# Altium PCB spine.PcbDoc
Units mm, origin at the board's own origin, x right, y up, seen from the top; angles counter-clockwise.
Board outline 56 x 85.01 mm, 2 copper layers (Top, Bottom); 70 components, 74 nets, 404 pads, 89 vias.
Unrouted connection lines stored in the file: 1.
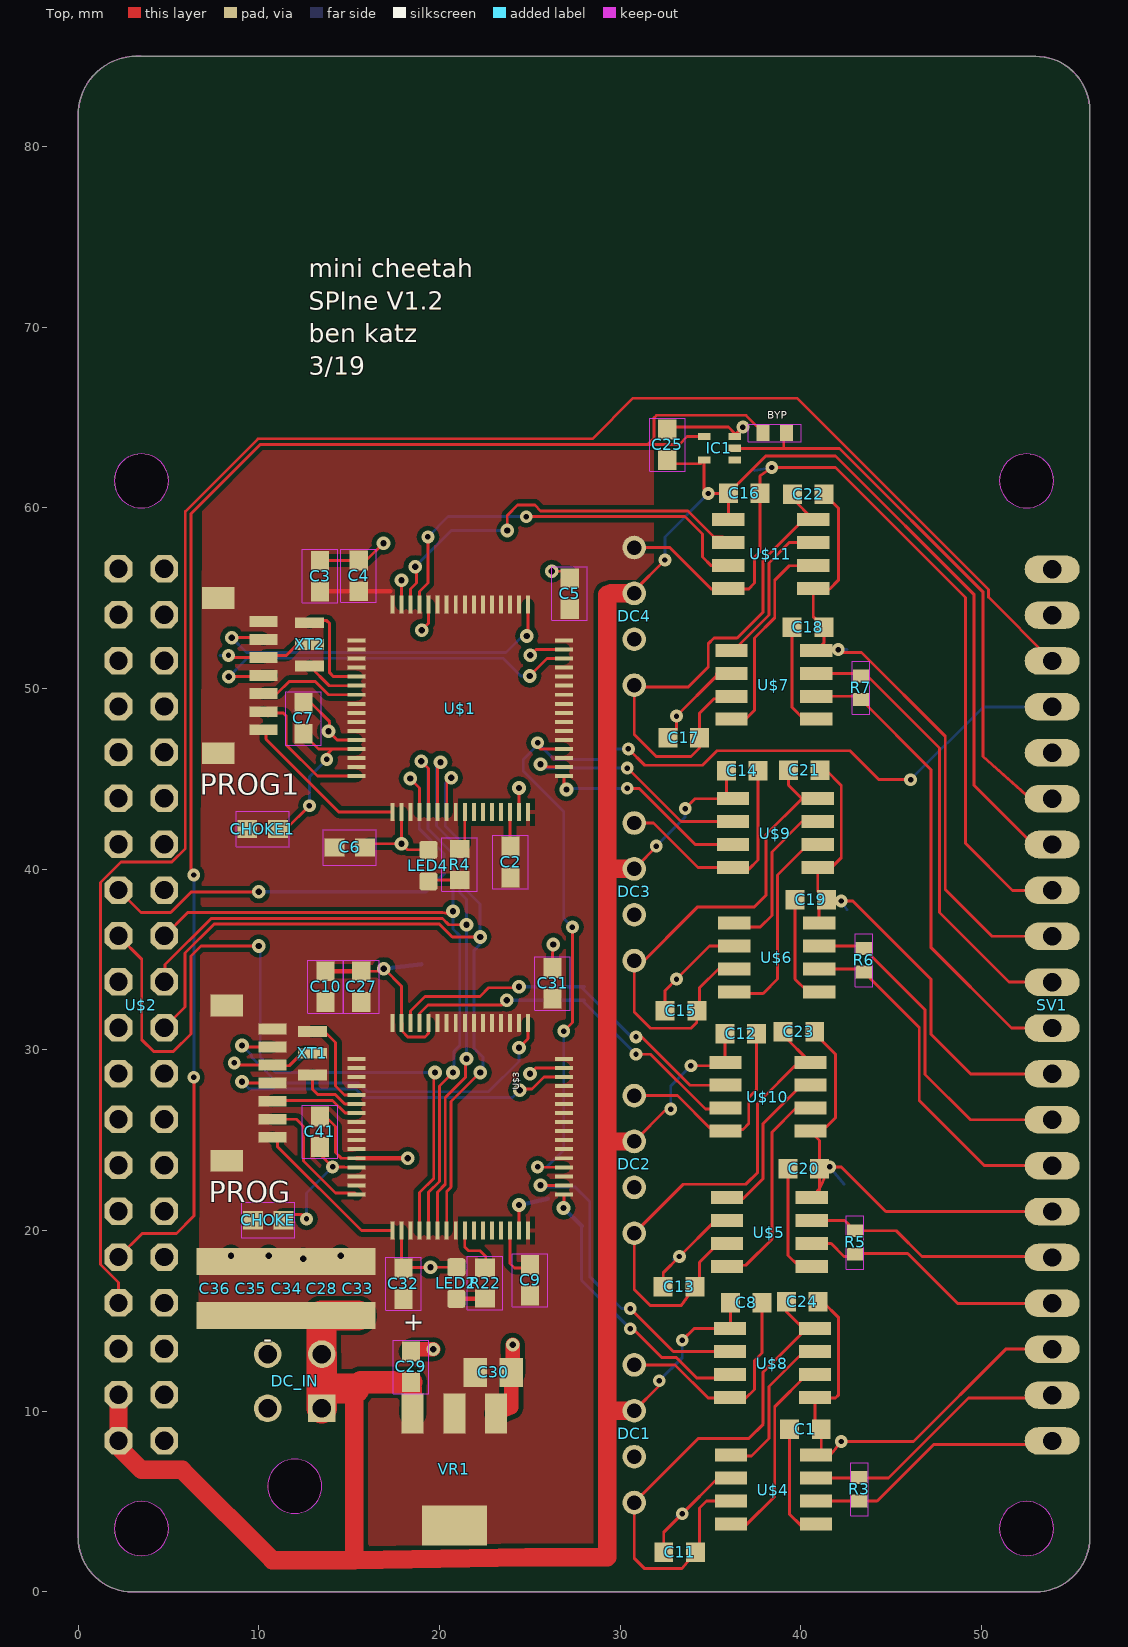
[diagram p0: Top view]
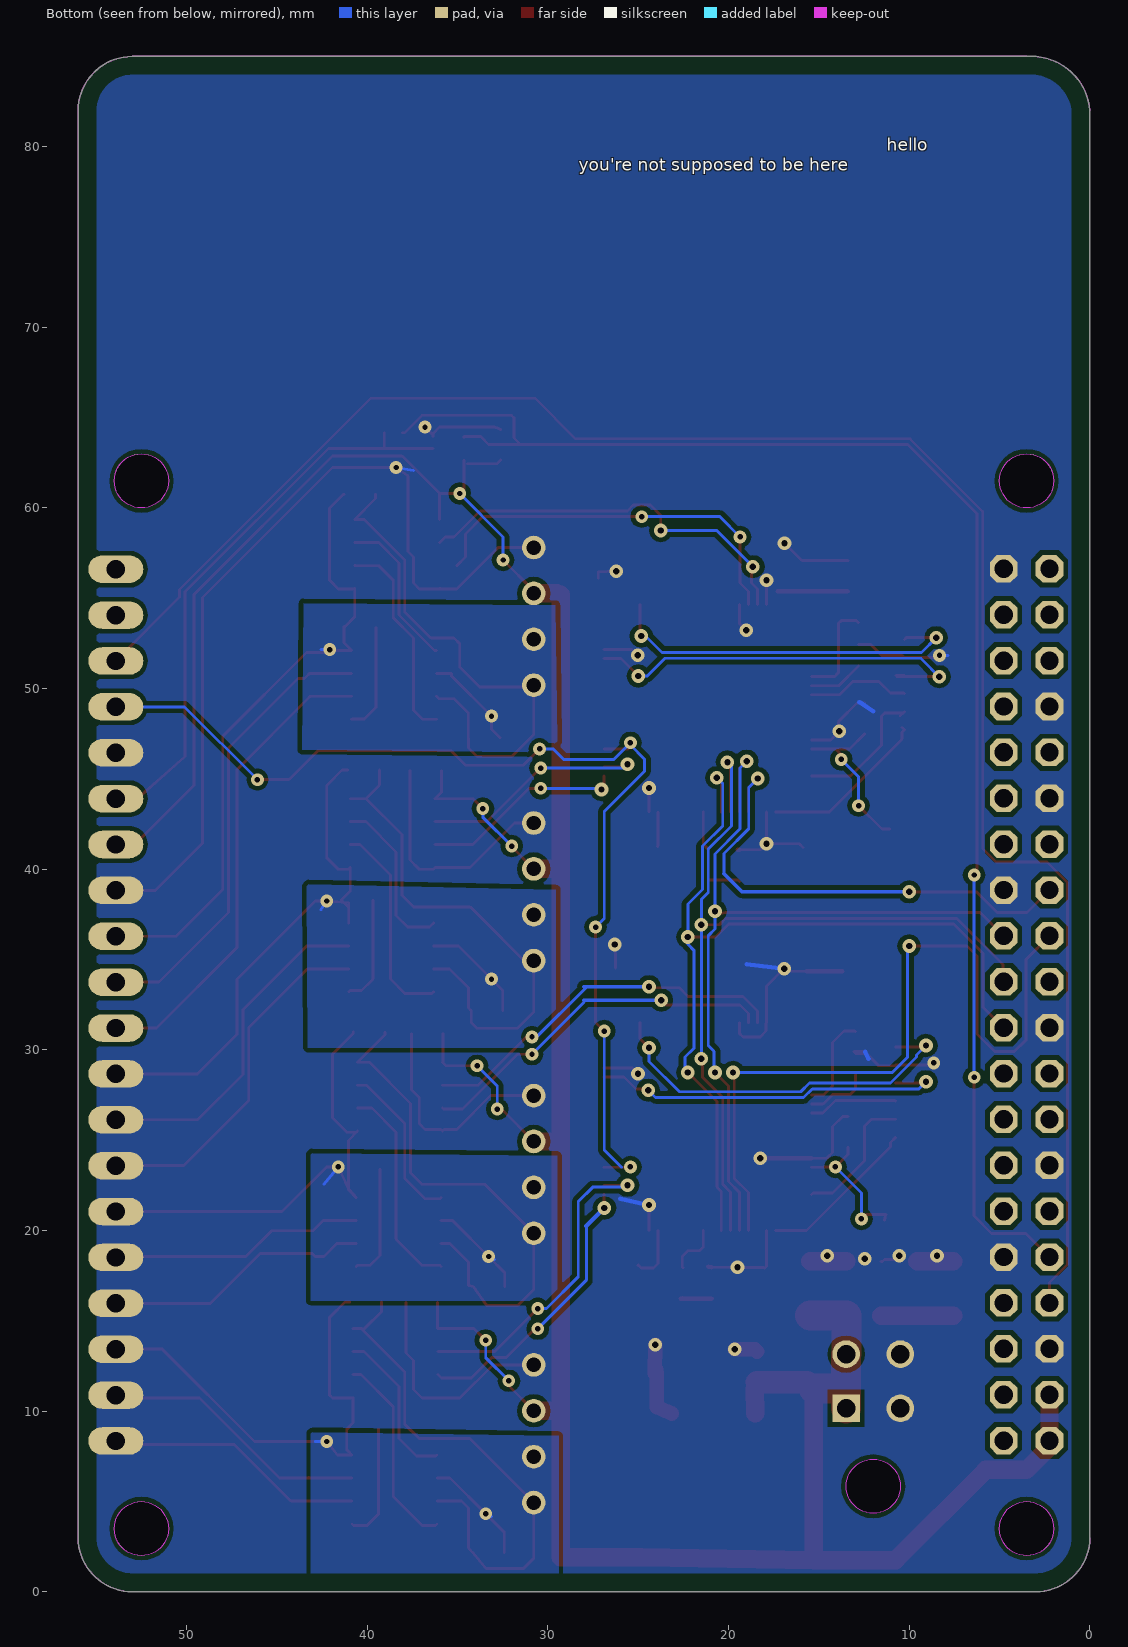
[diagram p1: Bottom view, seen from below]

## Layer stack, top to bottom
Top Solder: solder mask 0.0102, Solder Resist, Dk 3.5
Top: signal copper 0.035
Dielectric 1: dielectric 0.32, FR-4, Dk 4.8
Bottom: signal copper 0.035
Bottom Solder: solder mask 0.0102, Solder Resist, Dk 3.5

## Board outline
56,82 56,3 cw(c53,3) 53,0 3,0 cw(c3,3) 0,3 0,82 cw(c3.25,81.75) 3.5,85 53,85 cw(c53,82)
cut-out: 52.5,60 ccw(c52.5,61.5) 54,61.5 ccw(c52.5,61.5) 52.5,63 ccw(c52.5,61.5) 51,61.5 ccw(c52.5,61.5)
cut-out: 52.5,2 ccw(c52.5,3.5) 54,3.5 ccw(c52.5,3.5) 52.5,5 ccw(c52.5,3.5) 51,3.5 ccw(c52.5,3.5)
cut-out: 3.5,60 ccw(c3.5,61.5) 5,61.5 ccw(c3.5,61.5) 3.5,63 ccw(c3.5,61.5) 2,61.5 ccw(c3.5,61.5)
cut-out: 11.99,4.34 ccw(c11.99,5.84) 13.49,5.84 ccw(c11.99,5.84) 11.99,7.34 ccw(c11.99,5.84) 10.49,5.84 ccw(c11.99,5.84)
cut-out: 3.5,2 ccw(c3.5,3.5) 5,3.5 ccw(c3.5,3.5) 3.5,5 ccw(c3.5,3.5) 2,3.5 ccw(c3.5,3.5)

## Design rules (kind name [scope] priority, off if disabled: settings)
BoardOutlineClearance mdCopperDimension [All] p1: gap=0.254 ignorepadtopadclearanceinfootprint=FALSE except(0: Arc-SplitContinuation Track-SplitContinuation SMDPad-SplitContinuation THPad-SplitContinuation Via-SplitContinuation Fill-SplitContinuation Poly-SplitContinuation Region-SplitContinuation Text-SplitContinuation; 1.016: Poly-OutlineEdge Poly-CavityEdge Poly-CutoutEdge Poly-SplitBarrior)
Clearance Clearance_for_PolygonClass_Isolate_9.84 [InPolygonClass('Isolate_9.84') vs IsArc Or IsTrack Or IsPad Or IsVia Or IsFill Or IsRegion Or IsText] p1: gap=0.25 ignorepadtopadclearanceinfootprint=FALSE
Clearance Clearance_for_PolygonClass_Isolate_10 [InPolygonClass('Isolate_10') vs IsArc Or IsTrack Or IsPad Or IsVia Or IsFill Or IsRegion Or IsText] p2: gap=0.254 ignorepadtopadclearanceinfootprint=FALSE
Clearance "Clearance (Same Net)" [All] p3: gap=0.152 ignorepadtopadclearanceinfootprint=FALSE
Clearance [All] p4: gap=0.152 ignorepadtopadclearanceinfootprint=FALSE
HoleSize [All] p1: absolutevalues=TRUE maxlimit=2540 minlimit=0.3 maxpercent=80.000 minpercent=20.000
HoleToHoleClearance mdDrill [All] p1: gap=0.152 allowstackedmicrovias=TRUE
MinimumSolderMaskSliver [All] p1 off: minsoldermaskwidth=0.254
PasteMaskExpansion mlMinCreamFrame [All] p1: expansion=0
PolygonConnect PolygonConnect_For_PolygonThermal_ON_Width98400_Gap100000 [InPolygonClass('PolygonThermal_ON_Width98400_Gap100000') vs Not IsVia] p1: connectstyle=Relief reliefconductorwidth=0.25 reliefentries=4 polygonreliefangle="90 Angle" airgapwidth=0.254
PolygonConnect PolygonConnect_For_PolygonThermal_ON_Width100000_Gap100000 [InPolygonClass('PolygonThermal_ON_Width100000_Gap100000') vs Not IsVia] p2: connectstyle=Relief reliefconductorwidth=0.254 reliefentries=4 polygonreliefangle="90 Angle" airgapwidth=0.254
PolygonConnect PolygonConnect_For_PolygonThermal_ON_Width160000_Gap100000 [InPolygonClass('PolygonThermal_ON_Width160000_Gap100000') vs Not IsVia] p3: connectstyle=Relief reliefconductorwidth=0.406 reliefentries=4 polygonreliefangle="90 Angle" airgapwidth=0.254
PolygonConnect ThermalVias [IsVia] p4: connectstyle=Direct reliefconductorwidth=0.254 reliefentries=4 polygonreliefangle="90 Angle" airgapwidth=0.254
PolygonConnect [All] p5: connectstyle=Relief reliefconductorwidth=0.254 reliefentries=4 polygonreliefangle="90 Angle" airgapwidth=0.254
RoutingVias [All] p1: holewidth=0.3 width=0.706 viastyle="Through Hole" minholewidth=0.3 minwidth=0.706 maxholewidth=2.54 maxwidth=2.54
SolderMaskExpansion mlMinStopFrame [All] p1: expansion=0.102 istentingtop=FALSE
Width [All] p1: maxlimit=0.254 minlimit=0.152 preferedwidth=0.152
26 further rules are at their usual default settings.

## Classes and differential pairs
polygon class PolygonThermal_ON_Width98400_Gap100000: Polygon_1_Net_3V3
polygon class PolygonThermal_ON_Width100000_Gap100000: Polygon_1_Net_CAN1_GND Polygon_1_Net_CAN2_GND Polygon_1_Net_CAN3_GND
polygon class PolygonThermal_ON_Width160000_Gap100000: Polygon_1_Net_CAN4_GND Polygon_1_Net_GND
polygon class Isolate_9.84: Polygon_1_Net_3V3
polygon class Isolate_10: Polygon_1_Net_CAN1_GND Polygon_1_Net_CAN2_GND Polygon_1_Net_CAN3_GND Polygon_1_Net_CAN4_GND Polygon_1_Net_GND

## Components (designator, comment, footprint, x,y, rotation, side; value= is the part's Value field where it differs from the comment)
BYP "" R0402 38.56,64.16 r180 top
C1 ".1 uF" C0603K 40.26,9 r0 top
C2 "4.7" C0603 23.94,40.4 r90 top
C3 "1uF" C0603 13.39,56.23 r90 top
C4 "100nF" C0603 15.53,56.24 r90 top
C5 "100nF" C0603 27.21,55.26 r90 top
C6 "100nF" C0603 15.03,41.21 r0 top
C7 "1 uF" C0603 12.46,48.35 r90 top
C8 ".1 uF" C0603K 36.98,16.01 r0 top
C9 "4.7" C0603 25.02,17.25 r90 top
C10 "1uF" C0603 13.69,33.5 r90 top
C11 "1 uF" C0603K 33.29,2.18 r180 top
C12 ".1 uF" C0603K 36.68,30.89 r0 top
C13 "1 uF" C0603K 33.26,16.9 r180 top
C14 ".1 uF" C0603K 36.76,45.45 r0 top
C15 "1 uF" C0603K 33.37,32.17 r180 top
C16 ".1 uF" C0603K 36.87,60.81 r0 top
C17 "1 uF" C0603K 33.53,47.28 r180 top
C18 ".1 uF" C0603K 40.4,53.39 r0 top
C19 ".1 uF" C0603K 40.56,38.3 r0 top
C20 ".1 uF" C0603K 40.17,23.41 r0 top
C21 ".1 uF" C0603K 40.19,45.49 r0 top
C22 ".1 uF" C0603K 40.41,60.76 r0 top
C23 ".1 uF" C0603K 39.9,31 r0 top
C24 ".1 uF" C0603K 40.09,16.05 r0 top
C25 "100nF" C0603 32.61,63.5 r90 top
C27 "100nF" C0603 15.67,33.5 r90 top
C28 "47 uF" C1206K 13.47,16.79 r90 top
C29 "100nF" C0603 18.42,12.45 r90 top
C30 "10uF" C0805K 22.97,12.15 r0 top
C31 "100nF" C0603 26.26,33.68 r90 top
C32 "100nF" C0603 18,17.06 r90 top
C33 "47 uF" C1206K 15.47,16.79 r90 top
C34 "47 uF" C1206K 11.55,16.79 r90 top
C35 "47 uF" C1206K 9.55,16.79 r90 top
C36 "47 uF" C1206K 7.55,16.79 r90 top
C41 "1 uF" C0603 13.38,25.47 r90 top
CHOKE "600r" 0603 10.52,20.57 r0 top
CHOKE1 "600r" 0603 10.21,42.22 r0 top
DC1 "VA-1224S" 4SIL 30.78,8.75 r270 top
DC2 "VA-1224S" 4SIL 30.78,23.66 r270 top
DC3 "VA-1224S" 4SIL 30.78,38.75 r270 top
DC4 "VA-1224S" 4SIL 30.78,54 r270 top
DC_IN "" 43045-0400 11.99,5.84 r0 top
IC1 "74AHC1G14DCK" SC70-5 35.5,63.3 r90 top
LED2 "G" LED-0603 20.93,17.09 r0 top
LED4 "G" LED-0603 19.39,40.2 r0 top
PROG "BM07B-SRSS-TB" BM07B-SRSS-TB 9.12,28.16 r90 top
PROG1 "BM07B-SRSS-TB" BM07B-SRSS-TB 8.64,50.72 r90 top
R3 "" R0402 43.24,5.68 r90 top
R4 "70" R0603 21.12,40.26 r90 top
R5 "" R0402 43.01,19.34 r90 top
R6 "" R0402 43.49,34.96 r90 top
R7 "" R0402 43.33,50.05 r90 top
R22 "70" R0603 22.52,17.09 r90 top
SV1 "" MA20-1L 53.92,32.48 r90 top
U$1 "STM32F446RET6" TQFP64 21.15,48.91 r270 top
U$2 "" UP_BOARD 56,0 r90 top
U$3 "STM32F446RET6" TQFP64 21.15,25.75 r270 top
U$4 "MCP2561" SO08 38.49,5.66 r270 top
U$5 "MCP2561" SO08 38.26,19.91 r270 top
U$6 "MCP2561" SO08 38.67,35.12 r270 top
U$7 "MCP2561" SO08 38.51,50.21 r270 top
U$8 "SI8410" SO08 38.43,12.66 r270 top
U$9 "SI8410" SO08 38.59,42 r270 top
U$10 "SI8410" SO08 38.18,27.41 r270 top
U$11 "SI8410" SO08 38.34,57.46 r270 top
VR1 "LM1117" SOT-223 20.83,6.77 r180 top
XT1 "CSTCE" CSTCE 12.97,29.81 r270 top
XT2 "CSTCE" CSTCE 12.81,52.45 r270 top

## Footprints (in the part's own frame and the unit in brackets; to place one, negate y for a bottom-side part, rotate by r counter-clockwise, add the part's x,y. Pads: shape width x height; smd on the part's side, far side on the other; paste and mask are expansions set on the pad)
4SIL [mil] "4SIL"
  round 51.5 hole 31.5: 1(-150,0) 2(-50,0) 3(50,0) 4(150,0)
  body extent -176,-26 176,26, height 50
0603 [mm] "0603"
  rect 1.1x1 smd: 1(-0.85,0) 2(0.85,0)
  Top keep-out lines w0.051: -1.473,-0.983 -1.473,0.983 1.473,0.983 1.473,-0.983 -1.473,-0.983
  body extent -1.5,-1.01 1.5,1.01, height 3.81
43045-0400 [mm] "43045-0400"
  rect 1.53x1.53 / inner round 1.414 / far side rect 1.53x1.53 hole 1.02: P$1(1.5,4.32)
  round 1.53 hole 1.02: P$2(-1.5,4.32) P$3(1.5,7.32) P$4(-1.5,7.32)
  body extent -2.27,3.55 2.27,8.09, height 1.27
BM07B-SRSS-TB [mm] "BM07B-SRSS-TB"
  rect 0.6x1.55 smd: 1(3,-1.625) 2(2,-1.625) 3(1,-1.625) 4(0,-1.625) 5(-1,-1.625) 6(-2,-1.625) 7(-3,-1.625)
  rect 1.2x1.8 smd: FIT@1(4.3,0.9) FIT@2(-4.3,0.9)
  body extent -4.9,-2.4 4.9,1.8, height 3.81
C0603 [mm] "C0603"
  rect 1.1x1 smd: 1(-0.85,0) 2(0.85,0)
  Top keep-out lines w0.051: -1.473,0.983 -1.473,-0.983 1.473,-0.983 1.473,0.983 -1.473,0.983
  body extent -1.5,-1.01 1.5,1.01, height 3.81
C0603K [mm] "C0603K"
  rect 1.05x1.08 smd: 1(-0.875,0) 2(0.875,0)
  body extent -1.4,-0.54 1.4,0.54, height 3.81
C0805K [mm] "C0805K"
  rect 1.3x1.6 smd: 1(-1,0) 2(1,0)
  body extent -1.65,-0.8 1.65,0.8, height 3.81
C1206K [mm] "C1206K"
  rect 1.5x2 smd: 1(-1.5,0) 2(1.5,0)
  body extent -2.25,-1 2.25,1, height 3.81
CSTCE [mm] "CSTCE"
  rect 0.6x1.6 smd: 1(-1.2,0) 2(0,0) 3(1.2,0)
  body extent -1.5,-0.8 1.5,0.8, height 1.27
LED-0603 [mm] "LED-0603"
  rrect30% 1x1 smd: A(0,-0.877) C(0,0.877)
  body extent -0.51,-1.39 0.51,1.39, height 1.27
MA20-1L [mil] "MA20-1L"
  oval 60x120 hole 40: 1(950,0) 2(850,0) 3(750,0) 4(650,0) 5(550,0) 6(450,0) 7(350,0) 8(250,0) 9(150,0) 10(50,0) 11(-50,0) 12(-150,0) 13(-250,0) 14(-350,0) 15(-450,0) 16(-550,0) 17(-650,0) 18(-750,0) 19(-850,0) 20(-950,0)
  body extent -980,-60 980,60, height 150
R0402 [mm] "R0402"
  rect 0.7x0.9 smd: 1(-0.65,0) 2(0.65,0)
  Top keep-out lines w0.051: 1.473,0.483 1.473,-0.483 -1.473,-0.483 -1.473,0.483 1.473,0.483
  body extent -1.5,-0.51 1.5,0.51, height 3.81
R0603 [mm] "R0603"
  rect 1x1.1 smd: 1(-0.85,0) 2(0.85,0)
  Top keep-out lines w0.051: -1.473,0.983 -1.473,-0.983 1.473,-0.983 1.473,0.983 -1.473,0.983
  body extent -1.5,-1.01 1.5,1.01, height 3.81
SC70-5 [mm] "SC70-5"
  rect 0.4x0.7 smd: 1(-0.65,-0.85) 2(0,-0.85) 3(0.65,-0.85) 4(0.65,0.85) 5(-0.65,0.85)
  body extent -1.07,-1.2 1.07,1.2, height 3.81
SO08 [mm] "SO08"
  rect 0.72x1.78 smd: 1(-1.905,-2.35) 2(-0.635,-2.35) 3(0.635,-2.35) 4(1.905,-2.35) 5(1.905,2.35) 6(0.635,2.35) 7(-0.635,2.35) 8(-1.905,2.35)
  body extent -2.51,-3.24 2.51,3.24, height 3.81
SOT-223 [mm] "SOT-223"
  rect 1.219x2.235 smd: 1(-2.311,-3.099) 2(0,-3.099) 3(2.311,-3.099)
  rect 3.6x2.2 smd: 4(0,3.099)
  body extent -2.92,-4.22 2.92,4.2, height 3.81
TQFP64 [mm] "TQFP64"
  rect 0.22x1 smd: 1(-3.75,-5.75) 2(-3.25,-5.75) 3(-2.75,-5.75) 4(-2.25,-5.75) 5(-1.75,-5.75) 6(-1.25,-5.75) 7(-0.75,-5.75) 8(-0.25,-5.75) 9(0.25,-5.75) 10(0.75,-5.75) 11(1.25,-5.75) 12(1.75,-5.75) 13(2.25,-5.75) 14(2.75,-5.75) 15(3.25,-5.75) 16(3.75,-5.75) 33(3.75,5.75) 34(3.25,5.75) 35(2.75,5.75) 36(2.25,5.75) 37(1.75,5.75) 38(1.25,5.75) 39(0.75,5.75) 40(0.25,5.75) 41(-0.25,5.75) 42(-0.75,5.75) 43(-1.25,5.75) 44(-1.75,5.75) 45(-2.25,5.75) 46(-2.75,5.75) 47(-3.25,5.75) 48(-3.75,5.75)
  rect 1x0.22 smd: 17(5.75,-3.75) 18(5.75,-3.25) 19(5.75,-2.75) 20(5.75,-2.25) 21(5.75,-1.75) 22(5.75,-1.25) 23(5.75,-0.75) 24(5.75,-0.25) 25(5.75,0.25) 26(5.75,0.75) 27(5.75,1.25) 28(5.75,1.75) 29(5.75,2.25) 30(5.75,2.75) 31(5.75,3.25) 32(5.75,3.75) 49(-5.75,3.75) 50(-5.75,3.25) 51(-5.75,2.75) 52(-5.75,2.25) 53(-5.75,1.75) 54(-5.75,1.25) 55(-5.75,0.75) 56(-5.75,0.25) 57(-5.75,-0.25) 58(-5.75,-0.75) 59(-5.75,-1.25) 60(-5.75,-1.75) 61(-5.75,-2.25) 62(-5.75,-2.75) 63(-5.75,-3.25) 64(-5.75,-3.75)
  body extent -6.25,-6.25 6.25,6.25, height 3.81
UP_BOARD [mil] "UP_BOARD"
  oct 60x60 / inner round 55.43 / far side oct 60x60 hole 40: 1(329.53,2016.93) 2(329.53,2116.93) 3(429.53,2016.93) 4(429.53,2116.93) 5(529.53,2016.93) 6(529.53,2116.93) 7(629.53,2016.93) 8(629.53,2116.93) 9(729.53,2016.93) 10(729.53,2116.93) 11(829.53,2016.93) 12(829.53,2116.93) 13(929.53,2016.93) 14(929.53,2116.93) 15(1029.53,2016.93) 16(1029.53,2116.93) 17(1129.53,2016.93) 18(1129.53,2116.93) 19(1229.53,2016.93) 20(1229.53,2116.93) 21(1329.53,2016.93) 22(1329.53,2116.93) 23(1429.53,2016.93) 24(1429.53,2116.93) 25(1529.53,2016.93) 26(1529.53,2116.93) 27(1629.53,2016.93) 28(1629.53,2116.93) 29(1729.53,2016.93) 30(1729.53,2116.93) 31(1829.53,2016.93) 32(1829.53,2116.93) 33(1929.53,2016.93) 34(1929.53,2116.93) 35(2029.53,2016.93) 36(2029.53,2116.93) 37(2129.53,2016.93) 38(2129.53,2116.93) 39(2229.53,2016.93) 40(2229.53,2116.93)
  body extent 302,1989 2257,2145, height 150

## Part data
BYP R3 R5 R6 R7: library part R0402, PackageName=R0402
C1 C8 C11 C12 C13 C14 C15 C16 C17 C18 C19 C20 C21 C22 C23 C24: library part C0603K, PackageName=C0603K
C2 C3 C4 C5 C6 C7 C9 C10 C25 C27 C29 C31 C32 C41: library part C0603, PackageName=C0603
C28 C33 C34 C35 C36: library part C1206K, PackageName=C1206K
C30: library part C0805K, PackageName=C0805K
CHOKE CHOKE1: library part 0603, PackageName=0603
DC1 DC2 DC3 DC4: library part 4SIL, PackageName=4SIL
DC_IN: library part 43045-0400, PackageName=43045-0400
IC1: library part SC70-5, PackageName=SC70-5
LED2 LED4: library part LED-0603, PackageName=LED-0603
R4 R22: library part R0603, PackageName=R0603
SV1: library part MA20-1L, PackageName=MA20-1L
U$1 U$3: library part TQFP64, PackageName=TQFP64
U$2: library part UP_BOARD, PackageName=UP_BOARD
U$4 U$5 U$6 U$7 U$8 U$9 U$10 U$11: library part SO08, PackageName=SO08
VR1: library part SOT-223, PackageName=SOT-223
PROG PROG1: PackageName=BM07B-SRSS-TB
XT1 XT2: PackageName=CSTCE

## Free pads (board coordinates)
  round 3 hole 3 unplated: MH1(3.5,3.5) MH1(11.99,5.84) MH2(3.5,61.5) MH3(52.5,61.5) MH4(52.5,3.5)

## Via types
v1: diameter 0.756/0.756 (per signal layer), hole 0.35, Top to Bottom, 49 vias
v2: diameter 0.706/0.706 (per signal layer), hole 0.3, Top to Bottom, 40 vias

## Nets (pads, with @x,y where several pads share a name; then routed paths per layer and width w, separated by ;. In a path a pad name is that pad's centre, name@x,y a point inside that pad or via, vN(x,y) a via of type N, cw(c..) or ccw(c..) an arc to the next point about the centre after c; other vN are vias at no path point)
3V3: C2.1 C3.1 C4.1 C5.1 C6.1 C9.1 C10.1 C27.1 C30.1 C31.1 C32.1 CHOKE1.1 CHOKE.1 PROG1.1 PROG.1 U$1.1 U$1.19 U$1.32 U$1.48 U$1.64 U$3.1 U$3.19 U$3.32 U$3.48 U$3.64 VR1.2 VR1.4 | length 5.6
  Top w0.25: C3.1 17.28,55.38 C4.1
': C17.1 C22.1 DC4.4 U$7.3 U$11.8 | length 29.2
  Top w0.16: U$7.3 36.025,49.44 35.2,49.44 34.405,48.645 C17.1 34.4,47.275 34.4,46.72 33.92,46.24 32,46.24 30.78,47.46 DC4.4 30.89,50.08 33.76,50.08 34.88,51.2 34.88,52.48 35.2,52.8 36.48,52.8 37.92,54.24 37.92,57.12 40.165,59.365 U$11.8 39.535,60.52 C22.1
CAN1_GND: C1.2 C11.2 C24.2 DC1.3 SV1.18 U$4.2 U$4.8 U$8.5 | length 33.3
  Top w0.16: C11.2 32.415,3.295 v2(33.44,4.32) 35.415,6.295 U$4.2 ; C24.2 41.23,16.05 42.08,15.2 42.08,10.88 41.92,10.72 40.815,10.72 U$8.5 40.78,9.355 C1.2 41.135,7.86 U$4.8 41.645,7.565 v2(42.24,8.32) 46.24,8.32 51.35,13.43 SV1.18
  Bottom w0.16: 33.12,4.16 v2(33.44,4.32) ; v2(42.24,8.32) 42.88,8.32
CAN1_H: R3.2 SV1.19 U$4.7 | length 17.4
  Top w0.16: R3.2 43.24,6.295 U$4.7 44.855,6.295 49.28,10.72 53.75,10.72 SV1.19
CAN1_L: R3.1 SV1.20 U$4.6 | length 14.5
  Top w0.16: U$4.6 43.24,5.025 R3.1 44.23,5.03 47.36,8.16 53.73,8.16 SV1.20
CAN1_RX: U$3.33 U$8.3 | length 15.7
  Top w0.16: v1(26.87,21.25) 26.9,21.28 U$3.33 ; v2(30.56,14.56) 30.72,14.56 32.32,12.96 33.12,12.96 34.24,11.84 35.895,11.84 U$8.3
  Bottom w0.16: 27.87,20.25 27.87,17.25 v2(30.56,14.56)
  Bottom w0.25: v1(26.87,21.25) 27.87,20.25
CAN1_TX: U$3.34 U$8.2 | length 18
  Top w0.16: v1(25.59,22.5) U$3.34 ; v2(30.56,15.68) 32.945,13.295 U$8.2
  Bottom w0.16: v1(25.59,22.5) 25.69,22.4 27.52,22.4 28.32,21.6 28.32,17.44 30.08,15.68 v2(30.56,15.68)
CAN2_GND: C13.2 C20.2 C23.2 DC2.3 SV1.15 U$5.2 U$5.8 U$10.5 | length 33.5
  Top w0.16: C13.2 32.385,17.665 v2(33.28,18.56) 35.265,20.545 U$5.2 ; C23.2 40.775,30.905 41.92,29.76 41.92,26.24 41.12,25.44 40.595,25.44 U$10.5 41.045,24.99 41.045,23.41 41.045,22.25 U$5.8 41.015,22.295 v2(41.6,23.52) 42.24,23.52 44.71,21.05 SV1.15
  Bottom w0.16: 32.96,18.4 33.12,18.56 v2(33.28,18.56) ; v2(41.6,23.52) 42.4,22.56
CAN2_H: R5.2 SV1.16 U$5.7 | length 14.2
  Top w0.16: U$5.7 42.455,20.545 R5.2 45.29,19.99 46.72,18.56 53.87,18.56 SV1.16
CAN2_L: R5.1 SV1.17 U$5.6 | length 14.8
  Top w0.16: U$5.6 41.685,19.275 42.4,18.56 42.88,18.56 R5.1 43.04,18.72 45.92,18.72 48.67,15.97 SV1.17
CAN2_RX: U$3.61 U$10.3 | length 20.3
  Top w0.16: U$3.61 18.9,32.02 19.36,32.48 23.45,32.48 v1(23.72,32.75) ; v2(30.88,29.76) 31.68,29.76 34.72,26.72 35.775,26.72 U$10.3
  Bottom w0.16: 28,32.75 28,32.64 v2(30.88,29.76)
  Bottom w0.2: v1(23.72,32.75) 28,32.75
CAN2_TX: U$3.62 U$10.2 | length 21.2
  Top w0.16: U$3.62 18.4,32.16 19.2,32.96 22.24,32.96 22.72,33.44 24.34,33.44 v1(24.4,33.5) ; v2(30.88,30.72) 31.2,30.72 33.875,28.045 U$10.2
  Bottom w0.16: 27.84,33.5 30.78,30.56 v2(30.88,30.72)
  Bottom w0.2: v1(24.4,33.5) 27.84,33.5 28,33.5
CAN3_GND: C15.2 C19.2 C21.2 DC3.3 SV1.12 U$6.2 U$6.8 U$9.5 | length 37.1
  Top w0.16: C15.2 32.495,33.295 v2(33.12,33.92) 34.955,35.755 U$6.2 ; C21.2 41.39,45.49 42.24,44.64 42.24,40.64 41.6,40 41.035,40 U$9.5 40.94,38.795 C19.2 41.02,37.885 U$6.8 41.025,38.145 v2(42.24,38.24) 42.88,38.24 47.2,33.92 47.2,30.88 49.41,28.67 SV1.12
  Bottom w0.16: v2@32.96,33.76 v2(33.12,33.92) ; v2(42.24,38.24) 42.56,37.76
CAN3_H: R6.2 SV1.13 U$6.7 | length 19
  Top w0.16: U$6.7 43.345,35.755 R6.2 46.88,32.22 46.88,28.64 49.39,26.13 SV1.13
CAN3_L: R6.1 SV1.14 U$6.6 | length 19.8
  Top w0.16: U$6.6 43.315,34.485 R6.1 46.56,31.24 46.56,27.2 50.17,23.59 SV1.14
CAN3_RX: U$1.33 U$9.3 | length 11.3
  Top w0.16: U$1.33 26.9,44.54 v1(27.03,44.41) ; v2(30.4,44.48) 31.04,44.48 34.155,41.365 U$9.3
  Bottom w0.16: v1(27.03,44.41) 27.1,44.48 v2(30.4,44.48)
CAN3_TX: U$1.34 U$9.2 | length 13.7
  Top w0.16: v1(25.59,45.82) 25.43,45.66 U$1.34 ; v2(30.4,45.6) 33.365,42.635 U$9.2
  Bottom w0.16: v1(25.59,45.82) 25.81,45.6 v2(30.4,45.6)
CAN4_GND: C17.2 C18.2 C22.2 DC4.3 SV1.9 U$7.2 U$7.8 U$11.5 | length 41.3
  Top w0.16: C17.2@32.64,47.295 C17.2 33.12,47.745 v2(33.12,48.48) 35.325,50.685 35.325,50.845 U$7.2 ; C22.2 41.32,60.76 42.08,60 42.08,56 41.6,55.52 40.725,55.52 U$11.5 40.69,53.975 C18.2 41.275,53.435 41.28,53.44 41.28,52.535 U$7.8 42.035,52.115 v2(42.08,52.16) 42.24,52 43.36,52 48,47.36 48,38.88 50.59,36.29 SV1.9
  Bottom w0.16: v2(42.08,52.16) 42.56,52.16
CAN4_H: R7.2 SV1.10 U$7.7 | length 25.5
  Top w0.16: U$7.7 43.185,50.845 R7.2 43.47,50.56 43.84,50.56 47.68,46.72 47.68,37.6 51.53,33.75 SV1.10
CAN4_L: R7.1 SV1.11 U$7.6 | length 26.4
  Top w0.16: U$7.6 43.155,49.575 R7.1 47.2,45.53 47.2,35.68 51.67,31.21 SV1.11
CAN4_RX: U$1.61 U$11.3 | length 22
  Top w0.16: U$1.61 18.9,55.38 19.36,55.84 v2(19.36,58.4) ; v2(24.8,59.52) 33.6,59.52 34.56,58.56 34.56,57.28 35.04,56.8
  Bottom w0.16: v2(19.36,58.4) 20.48,59.52 v2(24.8,59.52)
CAN4_TX: U$1.62 U$11.2 | length 22.4
  Top w0.16: U$1.62 18.4,55.52 18.72,55.84 18.72,56.68 v1(18.65,56.75) ; v1(23.75,58.75) 23.75,59.59 24.32,60.16 25.28,60.16 25.6,59.84 33.76,59.84 35.2,58.4 35.685,58.4 U$11.2
  Bottom w0.16: v1(18.65,56.75) 20.65,58.75 v1(23.75,58.75)
CS1: U$2.24 U$3.20 | length 43.3
  Top w0.16: U$2.24 3.52,35.02 3.52,30.56 4.16,29.92 5.28,29.92 6.24,30.88 6.24,35.2 6.79,35.75 v1(10,35.75) ; U$3.20 18.9,22.1 19.68,22.88 19.68,28.68 v1(19.75,28.75)
  Bottom w0.16: v1(10,35.75) 10.08,35.67 10.08,29.6 10.93,28.75 v1(19.75,28.75)
CS2: U$1.20 U$2.26 | length 27.6
  Top w0.16: U$2.26 3.48,37.6 5.12,37.6 6.27,38.75 v1(10,38.75) ; v1(18.38,45.02) 18.9,44.5 U$1.20
  Bottom w0.16: v1(18.38,45.02) 18.88,44.52 18.88,42.24 20.25,40.87 20.25,39.75
  Bottom w0.2: v1(10,38.75) 19.25,38.75 20.25,39.75
  Bottom w0.25: U$2.26@2.23,38.77 U$2.26
ESTOP: SV1.4 U$1.36 U$3.36 | length 60.5
  Top w0.16: v2(25.43,23.52) 25.45,23.5 U$3.36 ; 25.57,46.66 U$1.36 ; v2(26.88,31.04) 27.36,31.52 v2(27.36,36.8) ; v2(30.46,46.66) 31.36,45.76 34.56,45.76 35.36,46.56 42.72,46.56 44.32,44.96 v2(46.08,44.96)
  Bottom w0.16: 25.92,23.5 26.88,24.46 v2(26.88,31.04) ; v2(27.36,36.8) 26.88,37.28 26.88,43.2 24.64,45.44 24.64,46.08 25.43,46.87 v2(25.43,47) 26.35,46.08 29.12,46.08 29.7,46.66 v2(30.46,46.66) ; v2(46.08,44.96) 50.11,48.99 SV1.4
GND: C3.2 C4.2 C5.2 C6.2 C7.2 C8.2 C10.2 C12.2 C14.2 C16.2 C25.2 C27.2 C28.2 C29.2 C30.2 C31.2 C32.2 C33.2 C34.2 C35.2 C36.2 C41.2 DC1.1 DC2.1 DC3.1 DC4.1 DC_IN.P$2 DC_IN.P$4 IC1.3 LED2.C LED4.C PROG1.3 PROG.3 SV1.5 SV1.8 U$1.12 U$1.18 U$1.31 U$1.47 U$1.60 U$1.63 U$2.6 U$2.9 U$2.14 U$2.20 U$2.25 U$2.30 U$2.34 U$2.39 U$3.12 U$3.18 U$3.31 U$3.47 U$3.60 U$3.63 U$8.4 U$9.4 U$10.4 U$11.4 VR1.1 XT1.2 XT2.2 | length 169.3
  Top w0.16: v2(8.32,51.84) 8.44,51.72 PROG1.3 10.385,51.84 11.52,51.84 12.13,52.45 XT2.2 ; v1(8.46,18.6) 9.24,18.6 C35.2 ; v2(8.64,29.28) 8.76,29.16 PROG.3 10.785,29.12 11.68,29.12 12.37,29.81 XT1.2 13.06,29.9 XT1.2@12.44,29.9 ; v1(10.54,18.6) 10.74,18.4 11.36,18.4 11.47,18.29 C34.2 ; C7.2 12.88,49.2 13.92,48.16 13.92,47.7 v1(13.86,47.64) 14.34,47.16 U$1.12 ; C41.2 13.68,26.32 14.24,25.76 14.24,24.32 14.56,24 U$3.12 ; C3.2 13.4,57.09 C4.2 15.94,57.09 v1(16.9,58.05) ; v1(14.54,18.6) 14.85,18.29 C33.2 ; C27.2 16.77,34.35 v1(16.92,34.5) 17.9,33.52 U$3.63 17.92,31.48 17.92,31.04 18.24,30.72 19.2,30.72 19.4,30.92 U$3.60 ; C6.2 16.08,41.41 v1(17.9,41.41) ; U$3.18 17.9,18.01 C32.2 18.05,17.96 v1(19.5,17.96) 19.507,17.967 LED2.C ; U$1.18 v1(17.9,41.41) ; U$1.63 v1(17.9,56) ; v1(19.01,53.23) 19.4,53.62 U$1.60 ; LED4.C 18.233,41.077 v1(17.9,41.41) ; U$3.31 v1(24.4,21.41) ; U$1.31 v1(24.4,44.5) ; v1(25.01,28.68) 25.33,29 U$3.47 ; v1(25.02,51.84) 25.34,52.16 U$1.47 ; v1(26.21,56.5) 27.21,56.46 C5.2@27.21,56.11 ; C31.2 26.26,35.23 v1(26.3,35.83) ; DC1.1 33.04,12.56 34.88,10.72 36.045,10.72 U$8.4 36.115,10.72 36.96,10.72 37.44,11.2 37.44,12.8 37.855,13.215 C8.2 ; DC2.1 33.17,27.47 35.04,25.6 35.735,25.6 U$10.4 35.925,25.6 36.8,25.6 37.12,25.92 37.12,27.36 37.555,27.795 C12.2 ; DC3.1 31.84,42.56 34.305,40.095 U$9.4 36.335,40 37.12,40 37.635,40.515 C14.2 ; DC4.1 32.75,57.81 35.04,55.52 35.955,55.52 U$11.4 36.025,55.52 37.12,55.52 37.44,55.84 37.44,57.28 37.745,57.585 C16.2 37.745,61.775 v2(38.4,62.24) 41.92,62.24 49.12,55.04 49.12,41.44 51.73,38.83 SV1.8 ; C25.2 32.94,64.48 36,64.48 36.35,64.13 IC1.3 36.35,64.03 v2(36.8,64.48)
  Top w0.25: C10.2 C27.2 ; U$3.12 v1(18.25,24) ; LED4.C LED4.C@19.483,41.077 ; LED2.C LED2.C@21.123,18
  Top w0.813: C29.2 18.53,13.41 v1(19.65,13.42) ; VR1.1@23.141,9.869 23.97,10.218 C30.2 24,12.18 24,12.32 24.08,12.08 v1(24.05,13.68)
  Top w1.016: C36.2 C35.2 ; C28.2 C33.2
  Bottom w0.16: 7.84,51.84 v2(8.32,51.84) ; v2@8.48,29.44 v2(8.64,29.28) ; v2@36.64,64.64 v2(36.8,64.48) ; 37.44,62.08 v2(38.4,62.24)
  Bottom w0.25: 12,48.75 12.75,49.25 ; 12.25,29.5 12.44,29.9 ; v1(16.92,34.5) 19,34.75 ; v1(18.25,24) v1@18.5,24 ; v1(24.4,21.41) 26,21.75
  other v1: 12.46,18.44
INDICATOR1: R22.2 U$3.25 | length 2.9
  Top w0.16: U$3.25 21.4,19.08 21.6,18.88 22.24,18.88 22.56,18.56 22.56,17.98 R22.2
INDICATOR2: R4.2 U$1.25 | length 2.2
  Top w0.16: R4.2 21.4,41.39 U$1.25
L_5V: C8.1 C12.1 C14.1 C16.1 C25.1 C28.1 C29.1 C33.1 C34.1 C35.1 C36.1 DC1.2 DC2.2 DC3.2 DC4.2 DC_IN.P$1 DC_IN.P$3 IC1.5 SV1.7 U$2.2 U$2.4 U$8.1 U$9.1 U$10.1 U$11.1 VR1.3 | length 200.9
  Top w0.16: C28.1 14.47,15.29 C33.1@14.88,14.88 ; DC1.2 32.16,11.4 v2(32.16,11.68) ; DC3.2 32.16,41.4 v2(32,41.28) ; DC4.2 30.78,55.42 v2(32.48,57.12) ; DC2.2@30.85,24.93 DC2.2 32.57,26.72 v2(32.8,26.72) ; C25.1 32.81,62.45 34.45,62.45 ; v2(33.44,13.92) 34.085,14.565 U$8.1 36.105,14.59 C8.1 ; v2(33.6,43.36) 34.145,43.905 U$9.1 35.885,44.26 C14.1 ; v2(33.92,29.12) 35.635,29.12 U$10.1 35.805,29.34 C12.1 ; IC1.5 34.65,61.03 v2(34.88,60.8) 35.985,60.8 C16.1 ; U$11.1 35.995,59.37 C16.1 ; SV1.7 52.87,41.37 49.6,44.64 49.6,55.2 41.92,62.88 38.065,62.88 C16.1
  Top w0.406: C29.1 18.65,10.978 VR1.3@18.519,9.869
  Top w1.016: U$2.2 U$2.4 2.23,8.02 3.5,6.75 5.75,6.75 10.75,1.75 15.29,1.75 ; C36.1 C35.1 C34.1 ; 15.29,11.25 15.29,1.75 ; VR1.3@18.519,9.869 C29.1@18.538,11.25 ; 29.28,55.2 29.28,55.04 ; DC1.2 29.5,10.02 29.28,10.24 ; DC2.2 29.31,24.93 29.28,24.96 ; DC3.2 29.58,40.02 29.28,40.32 ; DC4.2 29.51,55.27 29.28,55.04 ; 15.29,1.75 24.84,1.91 29.28,1.91 29.28,10.24 ; 29.28,10.24 29.28,24.96 ; 29.28,24.96 29.28,40.32 ; 29.28,40.32 29.28,55.04
  Top w1.27: 15.29,11.25 15.64,11.6 C29.1
  Top w1.676: DC_IN.P$1 13.49,11.04 ; 15.29,11.25 13.7,11.25 13.49,11.04 ; C33.1 C28.1 13.47,13.18 DC_IN.P$3 13.49,11.04
  Bottom w0.16: v2(32,41.28) 33.6,42.88 v2(33.6,43.36) ; v2(32.16,11.68) 33.44,12.96 v2(33.44,13.92) ; v2(32.48,57.12) 32.48,58.4 v2(34.88,60.8) ; v2(32.8,26.72) 32.8,28 v2(33.92,29.12)
MC01: U$3.5 XT1.1 | length 5.3
  Top w0.16: XT1.1 13,31.04 13.6,31.04 14.24,30.4 14.24,28 14.74,27.5 U$3.5
MC02: U$1.5 XT2.1 | length 5.5
  Top w0.16: XT2.1 12.92,53.76 13.76,53.76 13.92,53.6 13.92,50.88 14.14,50.66 U$1.5
MISO: U$1.22 U$2.21 U$3.22 | length 49.1
  Top w0.16: U$2.21 4.8,33.8 4.8,34.72 7.36,37.28 20.16,37.28 20.51,36.93 v1(21.5,36.93) ; U$3.22 19.9,22.14 20.32,22.56 20.32,27.36 21.44,28.48 21.44,29.44 v1(21.5,29.5) ; U$1.22 19.9,45.77 v1(20.06,45.93)
  Bottom w0.16: v1(20.06,45.93) 19.84,45.71 19.84,42.4 21.12,41.12 21.12,38.72 21.5,38.34 v1(21.5,36.93) v1(21.5,29.5)
MOSI: U$1.23 U$2.19 U$3.23 | length 51.1
  Top w0.16: U$2.19 5.92,32.38 5.92,35.36 7.52,36.96 20,36.96 20.71,36.25 v1(22.25,36.25) ; U$3.23 20.4,22.16 20.64,22.4 20.64,27.14 v1(22.25,28.75) ; U$1.23 20.4,44.82 v1(20.65,45.07)
  Bottom w0.16: v1(20.65,45.07) 20.32,44.74 20.32,42.4 21.44,41.28 21.44,38.88 22.25,38.07 v1(22.25,36.25) 22.25,35.85 21.92,35.52 21.92,30.08 22.4,29.6 22.4,28.9 v1(22.25,28.75)
N$1: U$1.14
N$2: C41.1 CHOKE.2 U$3.13 | length 8
  Top w0.16: CHOKE.2 11.29,20.89 12.39,20.89 v2(12.64,20.64) ; C41.1 13.38,24.22 v2(14.08,23.52) 14.74,23.52 U$3.13
  Bottom w0.16: v2(12.64,20.64) 12.64,22.08 v2(14.08,23.52)
N$3: C9.2 U$3.30 | length 3.1
  Top w0.16: U$3.30@23.9,20 23.9,18.18 24.16,17.92 24.84,17.92 C9.2
N$4: C7.1 CHOKE1.2 U$1.13 | length 9.2
  Top w0.16: CHOKE1.2 11.5,42.22 v2(12.8,43.52) ; C7.1 13.3,46.66 14.08,46.66 ; v2(13.76,46.08) 13.76,46.34 14.08,46.66 ; U$1.13 14.08,46.66
  Bottom w0.16: v2(12.8,43.52) 12.8,45.12 v2(13.76,46.08)
N$5: C2.2 U$1.30 | length 1.9
  Top w0.16: U$1.30@23.9,43.16 23.9,41.29 C2.2
N$6: C1.1 U$4.5 | length 6.4
  Top w0.16: C1.1 39.385,4.295 40,3.68 40.765,3.68 U$4.5
N$7: LED4.A R4.1 | length 1.8
  Top w0.16: LED4.A 19.477,39.41 R4.1
N$8: U$1.6 XT2.3 | length 3
  Top w0.16: XT2.3 13.9,50.16 U$1.6
N$10: C20.1 U$5.5 | length 6.4
  Top w0.16: C20.1 39.295,18.625 39.84,18.08 40.535,18.08 U$5.5
N$11: C15.1 C21.1 DC3.4 U$6.3 U$9.8 | length 29.1
  Top w0.16: DC3.4 DC3.4@30.78,34.4 ; U$6.3 35.445,34.485 34.4,33.44 34.4,32.325 C15.1 34.24,32.165 34.24,31.52 33.92,31.2 31.68,31.2 30.78,32.1 DC3.4@30.78,34.4 ; C21.1 39.315,44.655 U$9.8@40.065,43.905 ; U$9.8 U$9.8@40.065,43.905 ; DC3.4@30.78,34.4 34.3,37.92 37.44,37.92 38.08,38.56 38.08,41.92 U$9.8@40.065,43.905
N$12: C11.1 C24.1 DC1.4 U$4.3 U$8.8 | length 29.8
  Top w0.16: U$4.3 34.785,5.025 34.4,4.64 34.4,2.415 C11.1 33.425,1.28 31.36,1.28 30.78,1.86 DC1.4 34.32,8.48 37.12,8.48 37.92,9.28 37.92,12.16 40.325,14.565 U$8.8 40.775,14.56 40.16,14.56 39.215,15.505 C24.1
N$14: U$4.1 U$8.7 | length 8.7
  Top w0.16: U$4.1 36.185,7.52 37.28,7.52 38.24,8.48 38.24,11.36 40.175,13.295 U$8.7
N$15: U$7.1 U$11.7 | length 8.7
  Top w0.16: U$7.1 36.275,52.115 38.24,54.08 38.24,56.96 39.36,58.08 40.675,58.08 U$11.7
N$16: U$4.4 U$8.6 | length 11
  Top w0.16: U$4.4 36.215,3.68 36.96,3.68 38.56,5.28 38.56,10.24 40.345,12.025 U$8.6
N$17: U$7.4 U$11.6 | length 11.6
  Top w0.16: U$7.4 36.945,48.305 37.44,48.8 37.44,52.8 38.56,53.92 38.56,56 39.36,56.8 40.665,56.8 U$11.6
N$18: C18.1 U$7.5 | length 6
  Top w0.16: C18.1 39.525,48.955 40.16,48.32 40.845,48.32 U$7.5
N$19: C13.1 C23.1 DC2.4 U$5.3 U$10.8 | length 29.1
  Top w0.16: U$5.3 35.435,19.275 34.4,18.24 34.4,16.955 C13.1 33.395,15.84 31.68,15.84 30.78,16.74 DC2.4 33.49,22.56 36.96,22.56 37.6,23.2 37.6,27.04 39.875,29.315 U$10.8 39.025,30.82 C23.1
N$20: U$5.1 U$10.7 | length 9
  Top w0.16: U$5.1 35.965,21.76 36.8,21.76 37.92,22.88 37.92,25.92 40.045,28.045 U$10.7
N$21: U$5.4 U$10.6 | length 11.7
  Top w0.16: U$5.4 35.985,18.08 36.96,18.08 38.4,19.52 38.4,25.44 39.735,26.775 U$10.6
N$22: C19.1 U$6.5 | length 6
  Top w0.16: C19.1 39.685,33.915 40.32,33.28 40.955,33.28 U$6.5
N$24: U$3.14
N$26: U$6.1 U$9.7 | length 9.2
  Top w0.16: U$6.1 36.545,36.8 37.76,36.8 38.4,37.44 38.4,40.96 40.075,42.635 U$9.7
N$27: U$6.4 U$9.6 | length 11.4
  Top w0.16: U$6.4 36.415,33.12 37.92,33.12 38.72,33.92 38.72,39.68 40.405,41.365 U$9.6
N$28: LED2.A R22.1 | length 1.9
  Top w0.25: LED2.A 22.653,16.213 R22.1
N$30: U$3.6 XT1.3 | length 3.6
  Top w0.16: XT1.3 12.96,28.6 12.96,27.84 13.28,27.52 14.24,27.52 14.76,27 U$3.6
NRST1: PROG.5 U$3.7 | length 5
  Top w0.16: PROG.5 10.785,27.2 14.08,27.2 14.78,26.5 U$3.7
NRST2: PROG1.5 U$1.7 | length 5.7
  Top w0.16: PROG1.5 10.305,49.76 11.04,49.76 11.68,50.4 13.12,50.4 13.86,49.66 U$1.7
SBUS_IN: BYP.1 IC1.2 SV1.6 | length 31.7
  Top w0.152: 39.04,63.3 39.06,63.32 BYP.1@39.06,64.16
  Top w0.16: IC1.2 39.04,63.3 42.14,63.3 50.08,55.36 50.08,46.24 52.73,43.91 SV1.6
SCK: U$1.21 U$2.23 U$3.21 | length 47.1
  Top w0.16: U$2.23 6.06,37.6 20.16,37.6 20.56,37.52 v1(20.75,37.68) ; v1(18.99,45.98) 19.4,45.57 U$1.21 ; U$3.21 19.4,22.12 20,22.72 20,28 v1(20.75,28.75)
  Bottom w0.16: v1(18.99,45.98) 19.36,45.61 19.36,42.24 20.75,40.85 v1(20.75,37.68) 20.75,36.69 21.12,36.32 21.12,30.24 20.8,29.92 20.8,28.8 v1(20.75,28.75)
SWO1: U$3.55
SWO2: U$1.55
TCK1: PROG.2 U$3.49 | length 21.2
  Top w0.16: v1(9.07,30.24) 9.15,30.16 PROG.2 ; v1(24.4,30.12) 24.9,30.62 U$3.49
  Bottom w0.16: v1(9.07,30.24) 9.6,29.71 9.6,29.6 11.04,28.16 15.52,28.16 16,27.68 22.72,27.68 24.4,29.36 v1(24.4,30.12)
TCK2: PROG1.2 U$1.49 | length 20.6
  Top w0.16: v1(8.5,52.82) 10.165,52.82 PROG1.2 ; v1(24.83,52.91) 24.9,52.98 U$1.49
  Bottom w0.16: v1(8.5,52.82) 9.32,52 23.68,52 24.59,52.91 v1(24.83,52.91)
TMS1: PROG.4 U$3.46 | length 20.4
  Top w0.16: v1(9.07,28.24) 9.15,28.16 PROG.4 ; v1(24.45,27.77) 24.52,27.84 25.12,27.84 25.78,28.5 U$3.46
  Bottom w0.16: v1(9.07,28.24) 9.47,27.84 15.36,27.84 15.84,27.36 24.04,27.36 v1(24.45,27.77)
TMS2: PROG1.4 U$1.46 | length 22.6
  Top w0.16: v1(8.34,50.66) 10.66,50.66 10.72,50.72 PROG1.4 ; v1(24.99,50.7) 25.95,51.66 U$1.46
  Bottom w0.16: v1(8.34,50.66) 9.24,51.56 9.34,51.66 9.36,51.68 23.52,51.68 24.5,50.7 v1(24.99,50.7)
USART1_RX: PROG.7 U$3.17 | length 8.9
  Top w0.16: PROG.7 11.04,24.865 11.04,24.64 15.68,20 U$3.17
USART1_TX: PROG.6 U$3.16 | length 7.5
  Top w0.16: PROG.6 12.08,26.16 12.48,25.76 12.48,23.84 14.24,22.08 15.32,22.08 U$3.16
USART2_RX: PROG1.7 U$1.17 | length 9.4
  Top w0.16: PROG1.7@10.385,47.84 PROG1.7 10.4,47.585 10.4,47.2 14.44,43.16 U$1.17
USART2_TX: PROG1.6 U$1.16 | length 7.9
  Top w0.16: PROG1.6@10.505,48.48 PROG1.6 10.345,48.64 11.36,48.64 11.52,48.48 11.52,46.88 13.24,45.16 U$1.16
XBEE_RX: SV1.3 U$2.8 | length 104.7
  Top w0.152: U$2.8 2.23,17.129 1.24,18.12 1.24,39.26 2.378,40.399 5.18,40.399 5.931,41.151 5.931,59.808 9.952,63.829 28.469,63.829 30.72,66.08 39.796,66.08 50.389,55.488 50.389,55.061 SV1.3
XBEE_TX: BYP.2 IC1.4 U$2.10 | length 82.5
  Top w0.152: 31.52,63.52 31.881,63.882 31.881,64.995 32.015,65.129 36.974,65.129 37.943,64.16 BYP.2@38.06,64.16
  Top w0.16: U$2.10 3.54,19.84 5.44,19.84 6.4,20.8 v2(6.4,28.48) ; v2(6.4,39.68) 6.24,39.84 6.24,59.68 10.08,63.52 31.52,63.52 33.28,63.52 33.71,63.95 IC1.4 IC1.4@34.65,63.91
  Bottom w0.16: v2(6.4,28.48) v2(6.4,39.68)
pads on no net: IC1.1 PROG1.FIT@1 PROG1.FIT@2 PROG.FIT@1 PROG.FIT@2 SV1.1 SV1.2 U$1.2 U$1.3 U$1.4 U$1.8 U$1.9 U$1.10 U$1.11 U$1.15 U$1.24 U$1.26 U$1.27 U$1.28 U$1.29 U$1.35 U$1.37 U$1.38 U$1.39 U$1.40 U$1.41 U$1.42 U$1.43 U$1.44 U$1.45 U$1.50 U$1.51 U$1.52 U$1.53 U$1.54 U$1.56 U$1.57 U$1.58 U$1.59 U$2.1 U$2.3 U$2.5 U$2.7 U$2.11 U$2.12 U$2.13 U$2.15 U$2.16 U$2.17 U$2.18 U$2.22 U$2.27 U$2.28 U$2.29 U$2.31 U$2.32 U$2.33 U$2.35 U$2.36 U$2.37 U$2.38 U$2.40 U$3.2 U$3.3 U$3.4 U$3.8 U$3.9 U$3.10 U$3.11 U$3.15 U$3.24 U$3.26 U$3.27 U$3.28 U$3.29 U$3.35 U$3.37 U$3.38 U$3.39 U$3.40 U$3.41 U$3.42 U$3.43 U$3.44 U$3.45 U$3.50 U$3.51 U$3.52 U$3.53 U$3.54 U$3.56 U$3.57 U$3.58 U$3.59

## Polygon pours and split planes (outlines as drawn)
CAN4_GND on Bottom "Polygon_1_Net_CAN4_GND" (solid, remove dead copper, pour order 2): 29.579,54.612 43.521,54.725 43.595,46.619 29.484,46.454
CAN3_GND on Bottom "Polygon_1_Net_CAN3_GND" (solid, remove dead copper, pour order 3): 29.563,38.874 43.338,39.16 43.286,30.123 29.563,30.123
CAN2_GND on Bottom "Polygon_1_Net_CAN2_GND" (solid, remove dead copper, pour order 1): 29.493,24.126 43.127,24.278 43.127,16.123 29.493,16.123
CAN1_GND on Bottom "Polygon_1_Net_CAN1_GND" (solid, remove dead copper, pour order 0): 29.403,8.625 43.127,8.839 43.127,0.873 29.403,0.873
GND on Bottom "Polygon_1_Net_GND" (solid, remove dead copper, pour order 5): -0.203,84.553 56.203,84.553 56.203,-0.203 -0.203,-0.203
3V3 on Top "Polygon_1_Net_3V3" (solid, remove dead copper, pour order 4): 6.876,63.875 31.875,63.875 31.875,1.125 6.625,1.125

## Keep-outs
Keep-Out Layer:
  the board outline again, w0

## Silkscreen, mask and mechanical layers (free items; w line width, h text height)
Top Overlay:
  text "mini cheetah" at 12.76,72.78 h1.02
  text "SPIne V1.2" at 12.76,70.98 h1.02
  text "ben katz" at 12.76,69.18 h1.02
  text "3/19" at 12.76,67.38 h1.02
  text "+" at 19.02,14.32 h1.02 r90
  text "-" at 10.25,13.5 h1.02
Bottom Overlay:
  text "hello" at 11.243,79.779 h0.69
  text "you're not supposed to be here" at 28.279,78.674 h0.69
Unrouted:
  lines w0: 11.55,15.29 13.47,15.29 ; 25.43,46.87 25.57,46.66 ; 25.45,23.5 25.92,23.5 ; 34.45,62.45 34.65,62.65 ; 35.04,56.8 35.99,56.825

## Text inside footprints (layer, text, board x,y; h text height)
SV1: tPlace "10" at 56.841,32.861 h1.97 r90; tPlace "20" at 56.841,7.334 h1.97 r90; tPlace "1" at 56.841,56.229 h1.97 r90